# Altium PCB Sensorbox_Hub_ESP32.PCBDOC (part 3 of 3)
Units mil, origin at the board's own origin, x right, y up, seen from the top; angles counter-clockwise.
Board outline 895.86 x 2876.17 mil, 2 copper layers (Top, Bot), stack 61.855 mil thick; 68 components, 62 nets, 284 pads, 203 vias.
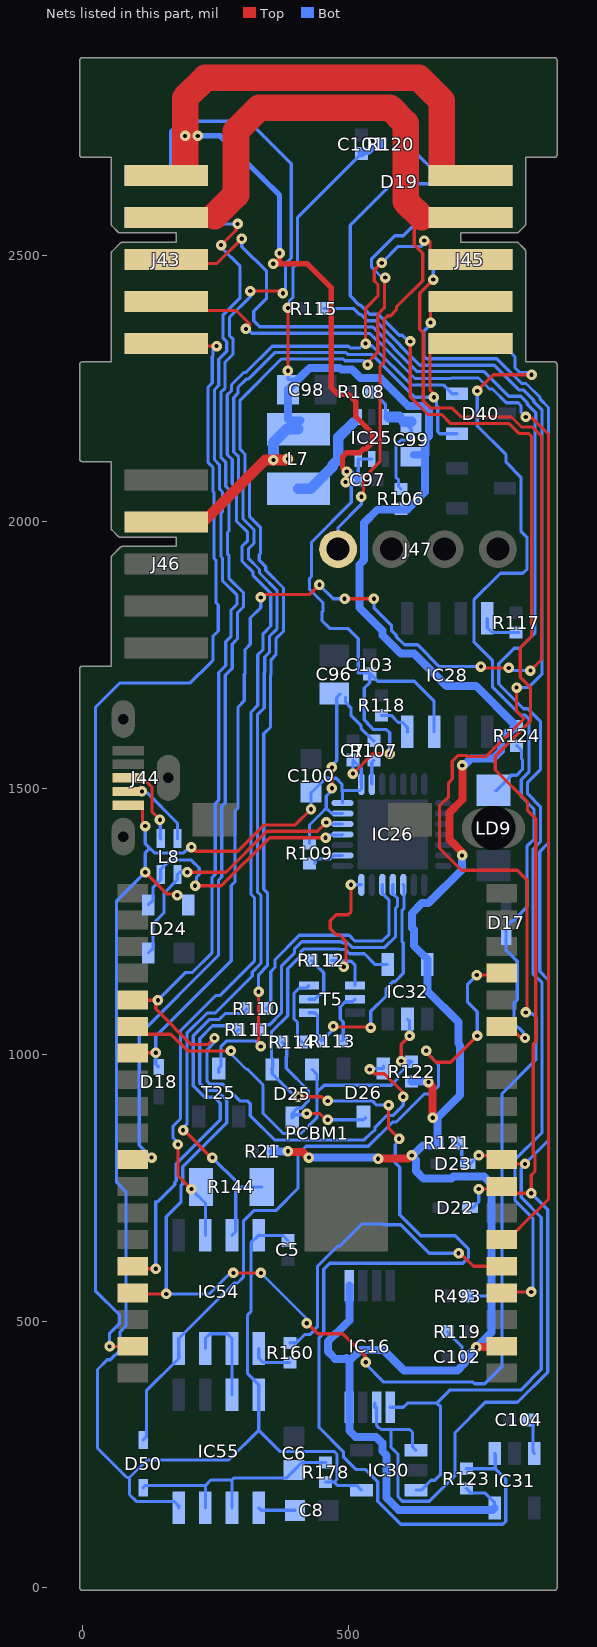
[diagram p2: the nets of this part, all layers, seen from the top]

## Via types
v1: diameter 19.68, hole 7.87, Top to Bot, tented both sides, 192 vias
v2: diameter 47.24, hole 31.5, Top to Bot, tented both sides, 7 vias
v3: diameter 30, hole 20, Top to Bot, tented both sides, 4 vias

## Nets (pads, with @x,y where several pads share a name; then routed paths per layer and width w, separated by ;. In a path a pad name is that pad's centre, name@x,y a point inside that pad or via, vN(x,y) a via of type N, cw(c..) or ccw(c..) an arc to the next point about the centre after c; other vN are vias at no path point) (continued)
GPIO0/EMAC_CLKIN: D25.2 IC32.2 PCBM1.25 R122.2 | length 881.8
  Top w6: PCBM1.25@94.49,1053.15 109.2,1038.43 166.29,1038.43 197.53,1007.2 v1(278.99,1007.2) ; v1(598.43,988.19) 598.43,1019.69 v1(614.17,1035.43)
  Bot w6: v1(278.99,1007.2) 278.99,1001.45 307.16,973.28 309.26,973.28 339.1,943.44 339.1,890.3 377.18,852.22 410.36,852.22 440.1,881.96 440.1,929.13 ; D25.2@431.1,972.44 440.1,963.44 440.1,929.13 ; v1(598.43,988.19) 616.07,988.19 R122.2@617.25,987.01 ; IC32.2@610.24,1066.93 614.17,1063 v1(614.17,1035.43) ; R122.2@618.11,987.01 617.32,987.01 593.29,962.97 593.29,956.54 579.58,942.84 453.81,942.84 440.1,929.13
GSM_PWR: D26.2 J43.7 PCBM1.24 | length 2613.9
  Top w6: PCBM1.24@94.49,1103.15 95.27,1102.36 v1(141.73,1102.36) 137.8,1098.43 137.8,1086.05 204.65,1019.2 235.73,1019.2 v1(248.03,1031.49) ; v1(260.3,2519.34) 288.72,2547.76 288.72,2556.43 v1(291.34,2559.05) ; 547.24,964.57 566.93,964.57 602.36,929.14 v1(602.36,921.26)
  Bot w6: v1(141.73,1102.36) 194,1154.63 206.72,1154.63 243.53,1191.43 243.53,1332.64 249.61,1338.72 249.61,1471.42 256.08,1477.89 256.08,1717.28 269.22,1730.43 269.22,1775.34 279.22,1785.34 279.22,1834.61 290.5,1845.88 290.5,1862.13 263.13,1889.5 263.13,1932.25 260.3,1935.08 260.3,2015.89 263.13,2018.72 263.13,2056.08 257.22,2061.98 257.22,2107.12 248.12,2116.23 248.12,2248.16 255.99,2256.03 255.99,2305.03 270.91,2319.95 270.91,2337.79 264.24,2344.45 264.24,2388.71 296.12,2420.58 296.12,2440.87 296.12,2479.4 260.3,2515.23 v1(260.3,2519.34) ; J43.7@157.48,2570.87 169.3,2559.05 v1(291.34,2559.05) ; v1(248.03,1031.49) 248.03,1023.62 234.11,1009.7 234.11,950.01 239.38,944.74 263.92,944.74 295.13,913.53 309.83,913.53 315.1,908.26 315.1,885.68 360.57,840.22 529.2,840.22 543.17,854.19 544.08,854.19 549.35,859.46 549.35,864.31 570.87,885.83 582.68,885.83 602.36,905.51 v1(602.36,921.26) ; v1(539.37,972.44) 541.34,974.41 D26.2@564.96,974.41 D26.2@564.96,978.35
IO0: D18.1 J45.8 PCBM1.26 | length 2638.2
  Top w6: PCBM1.26@94.49,1003.15 95.28,1003.94 v1(137.8,1003.94) ; 342.76,1863.85 426.84,1863.85 v1(444.88,1881.89) ; v1(492.13,1855.87) v1(547.24,1855.87) ; v1(658.53,2454.72) 658.53,2453.58 652.82,2447.86 651.67,2447.86 633.22,2429.41 633.22,2361.42 639.85,2354.79 639.85,2227.19 653.61,2213.44 694.36,2213.44 710.95,2196.85 805.37,2196.85 824.21,2178.01 844.39,2178.01 861.6,2160.8 861.6,1741.83 v1(840.77,1721) ; v1(748.03,1728.35) 750.42,1725.96 v1(800.37,1725.96)
  Bot w6: D18.1@143.17,976.97 137.8,982.35 v1(137.8,1003.94) 137.8,1034.79 279.53,1176.52 279.53,1317.73 286.57,1324.78 286.57,1457.47 292.08,1462.98 292.08,1652.45 303.99,1664.36 303.99,1714.29 305.22,1715.51 305.22,1760.42 315.22,1770.42 315.22,1819.7 334.64,1839.12 v1(334.64,1858.26) ; v1(444.88,1881.89) 444.88,1881.55 470.57,1855.87 v1(492.13,1855.87) ; v1(547.24,1855.87) 547.24,1839 579.92,1806.32 579.92,1796.71 589.23,1787.4 589.23,1784.66 604.5,1769.38 629.12,1769.38 670.15,1728.35 v1(748.03,1728.35) ; v1(658.53,2454.72) 658.53,2481.37 669.29,2492.12 J45.8@728.35,2492.12 ; v1(800.37,1725.96) 805.33,1721 v1(840.77,1721)
IO1: D17.1 J45.10 PCBM1.14 | length 1747.9
  Top w6: v1(740.92,2245.85) 771.08,2276.01 v1(842.95,2276.01) ; PCBM1.14@786.28,1054.27 PCBM1.14@787.4,1053.15 802.12,1038.43 816.15,1038.43 824.18,1030.39 829.61,1030.39 v1(830.71,1031.49)
  Bot w6: J45.10@728.35,2334.64 787.4,2334.64 811.87,2310.18 811.87,2289.1 820.6,2280.37 841.68,2280.37 841.68,2277.28 v1(842.95,2276.01) ; v1(740.92,2245.85) 740.92,2180.01 795.25,2125.69 795.25,2111.53 822.98,2083.8 822.98,1982.07 834.65,1970.4 834.65,1911.52 826.77,1903.65 784.8,1903.65 734.75,1853.6 734.75,1774.83 769.52,1740.06 769.52,1690.79 822.97,1637.35 830.89,1637.35 837.93,1630.31 837.93,1530.53 823.49,1516.09 823.49,1484.91 847.58,1460.81 847.58,1404.35 834.27,1391.03 834.27,1277.15 808.82,1251.7 805.82,1251.7 795.28,1241.15 D17.1@795.25,1220.34 795.28,1196.22 816,1175.5 816,1103.1 809.93,1097.04 809.93,1059.15 828.09,1040.99 828.09,1034.11 v1(830.71,1031.49)
MODBUS_A: D40.2 IC54.6 J45.3 R144.2 | length 2637.5
  Top w6: v1(179.28,831.63) 179.28,773.47 v1(204.72,748.03) ; v1(531.49,2334.64) 531.49,2400.57 554.93,2424.01 554.93,2445.42 547.77,2452.57 547.77,2471.86 v1(561.76,2485.85) ; v1(641.73,2528.01) 650.31,2528.01 652.61,2525.71 652.61,2508.81 669.29,2492.12 J45.3@728.35,2492.12
  Bot w6: v1(179.28,831.63) 179.28,835.34 170.13,844.49 170.13,866.07 184.28,880.22 184.28,1045.31 249.96,1110.98 257.61,1110.98 323.29,1176.66 323.29,1294.14 316.45,1300.98 316.45,1642.88 329.22,1655.65 329.22,1750.48 339.22,1760.48 339.22,1790.4 353.49,1804.67 353.49,1820.28 353.49,1866.07 320.4,1899.16 320.4,1905.61 299.58,1926.42 299.58,1954.03 310.18,1964.63 310.18,1980.24 289.35,2001.07 289.35,2063.79 281.22,2071.92 281.22,2117.06 272.12,2126.17 272.12,2238.21 279.99,2246.09 279.99,2257.13 303.22,2280.37 307.02,2280.37 356.24,2329.59 499.73,2329.59 503.01,2326.31 521.06,2326.31 527.28,2332.54 531.49,2332.54 531.49,2331.01 531.81,2330.7 543.62,2330.7 617.19,2257.13 677.05,2257.13 693.9,2240.29 D40.2@702.76,2240.29 ; v1(204.72,748.03) 230.91,721.85 IC54.6@230.91,661.42 ; v1(561.76,2485.85) 592.79,2516.87 636.18,2516.87 646.96,2527.65 646.6,2528.01 v1(641.73,2528.01)
MODBUS_B: D40.1 IC54.7 J45.5 R144.1 | length 2527.1
  Top w6: v1(188.98,858.27) 190.94,858.27 242.13,807.09 v1(244.09,807.09) ; v1@661.42,2232.28 661.42,2238.28 652.61,2247.09 652.61,2317.96 673.23,2338.58 J45.5@728.35,2338.58
  Bot w6: v1(188.98,858.27) 188.98,861.97 196.28,869.28 196.28,1040.33 234.41,1078.46 249.36,1078.46 318.71,1147.82 318.71,1155.11 335.29,1171.69 335.29,1299.11 328.45,1305.95 328.45,1637.91 341.22,1650.68 341.22,1717.72 342.22,1718.72 342.22,1746.51 351.22,1755.51 351.22,1785.43 365.49,1799.7 365.49,1825.25 365.49,1871.04 332.4,1904.13 332.4,1910.58 311.58,1931.39 311.58,1949.06 322.18,1959.66 322.18,1985.21 301.46,2005.94 301.46,2068.66 293.22,2076.89 293.22,2122.04 284.12,2131.14 284.12,2233.24 291.99,2241.12 291.99,2252.16 308.19,2268.37 311.99,2268.37 361.21,2317.59 494.76,2317.59 498.04,2314.31 543.04,2314.31 623.47,2233.88 v1(659.81,2233.88) ; v1(244.09,807.09) 291.34,759.84 291.34,751.97 ; IC54.7@280.91,661.42 287.82,668.34 287.82,748.45 291.34,751.97 ; R144.1@336.61,751.97 291.34,751.97 ; v1@664.87,2236.62 664.87,2218.25 666.81,2216.31 666.81,2169.51 670.83,2165.49 D40.1@702.76,2165.49
MODBUS_DE: IC54.2 IC54.3 IC55.3 | length 181.3
  Bot w6: IC54.3@230.91,448.82 230.91,467.52 239.72,476.33 272.09,476.33 280.91,467.52 IC54.2@280.91,448.82 IC55.3@280.91,362.2
MODBUS_DI: D50.1 IC54.4 PCBM1.16 | length 1380.9
  Top w6: v1(645.22,1007.43) 645.22,1004.6 663.74,986.09 691.66,986.09 v1(741.01,1035.43) ; v1(740.16,1149.61) 783.86,1149.61 PCBM1.16@787.4,1153.15
  Bot w6: D50.1@114.17,277.17 120.23,283.22 120.23,369.44 180.91,430.12 IC54.4@180.91,448.82 180.91,467.52 285.09,571.71 291.27,571.71 302.31,582.75 302.31,687.87 321.97,707.54 362.98,707.54 404.67,749.22 404.67,813.21 419.68,828.22 536.57,828.22 582.18,873.83 588.83,873.83 641.33,926.33 653.76,926.33 668.45,941.01 668.45,981.38 645.22,1004.6 v1(645.22,1007.43) ; v1(740.16,1149.61) 723.03,1132.47 723.03,1098.49 741.01,1080.51 v1(741.01,1035.43)
MODBUS_RO: PCBM1.5 R160.1 | length 589.1
  Top w6: v1(705.99,627.6) 712.25,621.34 715.96,621.34 734.15,603.15 PCBM1.5@787.4,603.15
  Bot w6: R160.1@389.76,459.45 401.62,459.45 416.99,474.82 426.67,474.82 441.13,489.29 441.13,602.74 479.62,641.22 482.96,641.22 523.96,682.23 564.69,682.23 565.82,681.1 597.4,681.1 650.9,627.6 v1(705.99,627.6)
NetC6_2: C6.2 D50.2 IC55.6 IC55.7 R178.2 | length 456.7
  Bot w6: D50.2@114.17,187.4 118.31,191.54 230.91,191.54 ; IC55.7@230.91,149.61 230.91,191.54 ; IC55.6@280.91,149.61 280.91,202.17 ; R178.2@456.69,235.04 412.2,235.04 C6.2@397.64,220.47 382.85,205.68 284.42,205.68 280.91,202.17 ; 230.91,191.54 241.54,202.17 280.91,202.17
NetC8_2: C8.2 IC55.5 | length 70.1
  Bot w6: IC55.5@330.91,149.61 335.24,145.28 C8.2@399.21,145.28
NetC96_2: C96.2 IC26.6 R107.2 R109.2 | length 443.6
  Top w6: v1(468.5,1500) v1(468.5,1539.37)
  Bot w6: R109.2@426.26,1396.46 426.26,1431.11 447.98,1452.82 457.82,1462.67 ; v1(468.5,1500) 468.5,1496.29 457.82,1485.61 457.82,1462.67 ; v1(468.5,1539.37) 468.5,1543.07 477.5,1552.07 477.5,1670.42 C96.2@484.25,1677.17 ; IC26.6@488.19,1452.76 467.73,1452.76 457.82,1462.67 ; C96.2@494.09,1671.26 494.09,1661.42 503.94,1651.57 503.94,1636.88 522.78,1618.04 522.78,1613.05 546.46,1589.37 R107.2@547.24,1589.37
NetC99_1: C99.1 IC25.6 R106.1 R108.2 | length 261.3
  Bot w6: R108.2@542.13,2248.03 542.13,2247.24 568.76,2220.61 568.76,2196.99 IC25.6@574.8,2196.85 ; R106.1@597.95,2061.81 593.36,2066.4 593.36,2079.13 588.44,2084.05 588.44,2144.62 593.71,2149.89 594.84,2149.89 598.63,2153.68 617.13,2153.68 617.13,2174.21 C99.1@603.21,2188.13
  Bot w20: IC25.6@574.8,2196.85 594.49,2196.85 ; C99.1@603.21,2188.13 C99.1@617.27,2188.13
NetC104_2: C104.2 IC31.3 | length 67.9
  Bot w6: C104.2@836.61,314.96 845.82,305.76 845.82,254.57 IC31.3@848.43,251.97
NetD19_1: D19.1 J45.7 T25.3 | length 2192.7
  Top w6: v1(330.71,1118.11) 330.71,1019.68 v1(334.64,1015.75) ; v1(535.43,2295.27) 531.49,2295.27 554.27,2318.05 554.27,2389.18 566.93,2401.83 566.93,2456.69 v1(568.62,2458.38)
  Bot w6: T25.3@255.91,966.54 T25.3@255.91,974.41 260.14,978.65 260.14,1015 271.18,1026.04 277.37,1026.04 324.35,1026.04 v1(334.64,1015.75) ; v1(330.71,1118.11) 330.71,1150.14 347.29,1166.72 347.29,1304.08 340.45,1310.92 340.45,1602.4 353.22,1615.17 353.22,1712.75 354.22,1713.75 354.22,1741.54 363.22,1750.54 363.22,1780.46 377.49,1794.73 377.49,1830.22 377.49,1876.01 344.4,1909.1 344.4,1915.55 332.16,1927.79 332.16,1938.46 334.18,1940.48 334.18,1990.18 313.46,2010.91 313.46,2073.63 305.22,2081.87 305.22,2127.01 296.12,2136.11 296.12,2228.27 373.44,2305.59 489.79,2305.59 493.07,2302.31 528.4,2302.31 v1(535.43,2295.27) ; v1@565.62,2455.38 553.98,2467.01 542.92,2478.05 542.92,2493.66 586.06,2536.8 602.41,2536.8 636.47,2570.86 ; D19.1@594.49,2610.88 594.49,2605.96 615.46,2584.99 622.35,2584.99 636.47,2570.86 ; J45.7@728.35,2570.86 636.47,2570.86
NetD24_2: D24.2 IC26.5 L8.4 | length 530.2
  Top w6: v1(196.85,1342.52) 269.58,1342.52 346.45,1419.39 441.05,1419.39 457.61,1435.95 v1(457.75,1435.95)
  Bot w6: D24.2@124.02,1190.94 132.83,1199.76 132.83,1246.08 153.25,1266.5 153.25,1303.44 178.01,1328.2 178.01,1338.05 L8.4@178.54,1338.58 182.48,1342.52 v1@196.31,1342.52 ; v1@452.76,1437.01 v1@453.81,1435.95 ; v1(457.75,1435.95) v1@453.81,1435.95 ; IC26.5@488.19,1433.07 456.69,1433.07 v1@453.81,1435.95
NetD24_3: D24.3 IC26.4 L8.1 | length 515.3
  Top w6: v1(211.62,1317.02) 261.05,1317.02 351.42,1407.39 v1(456.35,1407.39)
  Bot w6: D24.3@124.02,1281.5 132.83,1290.31 132.83,1314.52 147.05,1328.74 L8.1@147.05,1338.58 147.05,1348.42 163.92,1365.3 204.66,1365.3 219.53,1350.43 219.53,1338.55 214.23,1333.25 214.23,1319.64 v1(211.62,1317.02) ; v1(456.35,1407.39) 459.4,1407.39 464.28,1412.27 487.08,1412.27 IC26.4@488.19,1413.39
NetD25_3: D25.3 D26.3 R114.2 | length 327.2
  Top w6: v1(421.26,889.76) 445.8,889.76 457.61,877.95 v1(460.63,877.95)
  Bot w6: R114.2@375.2,1023.62 383.61,1015.2 383.61,996.88 382.73,995.99 382.73,974.62 424.35,933 424.35,913.45 410.46,899.56 403.5,899.56 393.7,889.76 D25.3@393.7,881.89 399.37,887.56 419.05,887.56 v1(421.26,889.76) ; v1(460.63,877.95) 527.56,877.95 D26.3@531.5,881.89
NetIC25_4: IC25.4 L7.1 | length 180
  Bot w20: L7.1@405.51,2062.01 428.15,2062.01 470.22,2104.08 470.22,2107.02 480.57,2117.37 480.57,2158.71 508.14,2186.28
NetIC26_2: IC26.2 R109.1 | length 61.4
  Bot w6: R109.1@437.01,1359.45 437.01,1366.54 438.34,1367.87 465.7,1367.87 471.85,1374.02 IC26.2@488.19,1374.02
NetIC26_9: IC26.9 R107.1 | length 46.1
  Bot w6: IC26.9@543.31,1507.87 543.31,1548.43 R107.1@547.24,1552.36
NetIC26_24: IC26.24 R113.1 T5.1 | length 476.3
  Top w6: v1(470.96,1053.64) 472.19,1052.41 540.11,1052.41 v1(541.34,1051.18)
  Bot w6: T5.1@425.2,1078.74 436.02,1078.74 441.58,1073.18 441.58,1034.01 R113.1@450,1025.59 450,1026.38 468.34,1044.72 468.34,1051.02 v1(470.96,1053.64) ; v1(541.34,1051.18) 541.34,1081.63 570.02,1110.31 570.02,1124.23 582.75,1136.96 586.69,1136.96 602.36,1152.63 602.36,1210.06 599.67,1212.75 599.67,1270.18 603.38,1273.89 603.38,1317.88 IC26.24@602.36,1318.9
NetIC26_25: IC26.25 R111.1 | length 486.3
  Bot w6: R111.1@337.4,1055.91 337.94,1056.45 351.46,1056.45 373.5,1078.48 373.5,1166.33 397.9,1190.73 397.9,1198.07 412.05,1212.22 485.59,1212.22 488.13,1209.68 498.12,1209.68 506.36,1201.44 534.56,1201.44 567.89,1201.44 587.67,1221.21 587.67,1275.15 591.38,1278.86 591.38,1293.86 582.68,1302.56 IC26.25@582.68,1318.9
NetIC26_26: IC26.26 R110.1 | length 439.5
  Bot w6: R110.1@345.28,1086.61 353.69,1095.03 353.69,1156.15 361.5,1163.96 361.5,1178.64 407.08,1224.22 500.55,1224.22 511.33,1213.44 547.31,1213.44 562.92,1213.44 575.67,1226.18 575.67,1290.07 562.99,1302.74 IC26.26@562.99,1318.9
NetIC26_28: IC26.28 R112.1 T5.4 | length 320.1
  Top w6: v1(490.68,1165.35) 493.3,1167.97 493.3,1174.46 494.56,1175.71 494.56,1213.25 482.56,1225.25 476.45,1225.25 465.41,1236.29 465.41,1251.9 476.45,1262.93 499.04,1262.93 503.94,1267.83 v1(503.94,1318.89)
  Bot w6: R112.1@467.32,1177.17 485.43,1177.17 486.35,1178.09 487.28,1177.17 ; v1(490.68,1165.35) 490.68,1173.76 487.28,1177.17 ; v1(503.94,1318.89) IC26.28@523.62,1318.9 ; T5.4@511.81,1129.92 511.81,1168.12 504.46,1175.47 489.44,1175.47 487.74,1177.17 487.28,1177.17
NetIC28_4: IC28.4 R118.2 | length 67.1
  Bot w6: R118.2@561.76,1637.15 562.03,1636.88 579.45,1636.88 592.74,1623.6 601.23,1623.6 610.04,1614.78 IC28.4@610.04,1606.3 IC28.4@610.8,1605.54
NetIC28_8: IC28.8 R117.2 | length 80.1
  Bot w6: IC28.8@760.04,1818.9 760.04,1801.33 768.85,1792.52 R117.2@818.9,1792.52
NetIC54_1: IC54.1 R160.2 | length 80.1
  Bot w6: IC54.1@330.91,448.82 330.91,431.25 339.72,422.44 R160.2@389.76,422.44
NetJ44_2: J44.2 L8.3 | length 145.7
  Top w6: J44.2@86.61,1494.09 v1(111.92,1494.09)
  Bot w6: v1(111.92,1494.09) 114.54,1491.48 121.79,1491.48 178.54,1434.72 L8.3@178.54,1405.51
NetJ44_3: J44.3 L8.2 | length 154.6
  Top w6: J44.3@86.61,1519.68 92.47,1513.83 118.84,1513.83 130.76,1501.9 130.76,1455.85 v1(145.67,1440.94)
  Bot w6: v1(145.67,1440.94) 146.36,1440.26 146.36,1406.2 L8.2@147.05,1405.51
NetLD9_2: LD9.2 R124.1 | length 117.2
  Bot w6: LD9.2@775.59,1496.06 777.56,1496.06 804.09,1522.59 804.09,1524.46 814.89,1524.46 825.93,1535.5 825.93,1553.78 824.17,1555.55 824.17,1571.5 815.75,1579.92 R124.1@814.96,1579.92
NetR112_2: R112.2 T5.2 | length 101.7
  Bot w6: T5.2@425.2,1104.33 436.02,1104.33 444.74,1113.05 447.63,1113.05 452.9,1118.32 452.9,1153.8 430.31,1176.38 R112.2@430.31,1177.17
NetR113_2: R113.2 T5.5 | length 101.8
  Bot w6: R113.2@487.01,1025.59 489.81,1028.39 489.81,1061.44 484.11,1067.14 484.11,1090.34 493.22,1099.46 506.94,1099.46 T5.5@511.81,1104.33
NetR114_1: R114.1 T5.3 | length 131.9
  Bot w6: R114.1@412.2,1023.62 403.79,1032.04 403.79,1060.85 397.5,1067.14 397.5,1115.93 406.61,1125.05 420.32,1125.05 T5.3@425.2,1129.92
OSC_DIS: D25.1 IC31.1 IC32.4 R123.2 | length 2293.1
  Top w6: v1(405.51,921.26) 449.05,921.26 456.93,913.38 v1(460.63,913.38) ; v1(574.8,905.51) 574.8,862.2 v1(594.49,842.52)
  Bot w6: v1(405.51,921.26) 402.89,923.88 396.99,923.88 356.3,964.57 D25.1@356.3,972.44 354.86,973.88 357.43,976.45 357.43,992.06 354.78,994.7 354.78,1042.8 385.5,1073.51 385.5,1161.36 409.9,1185.76 409.9,1193.1 415.17,1198.37 482.47,1198.37 483.16,1197.68 493.15,1197.68 501.39,1189.44 529.59,1189.44 549.74,1169.29 IC32.4@572.84,1169.29 ; v1(460.63,913.38) 460.77,913.53 544.08,913.53 552.1,905.51 v1(574.8,905.51) ; v1(594.49,842.52) 594.49,838.81 587.27,831.59 587.27,797.21 595.8,788.67 595.8,699.67 634.88,660.59 699.65,660.59 724.84,635.4 724.84,619.79 713.8,608.76 464.12,608.76 453.13,597.77 453.13,477.98 444.41,469.26 444.41,300.64 489.9,255.15 489.9,245.41 513.3,222.01 530.88,222.01 554.28,198.61 554.28,161.92 597.24,118.95 789.16,118.95 794.43,124.22 794.43,203.6 774.8,223.23 ; R123.2@720.47,223.23 774.8,223.23 ; IC31.1@773.62,251.97 774.8,250.79 774.8,223.23
P3V3: C98.1 C99.2 C101.2 C102.2 IC16.1 IC16.8 IC31.5 IC32.5 J46.2 L7.2 PCBM1.2 R21.2 R106.2 R119.1 R120.2 R121.2 R122.1 R123.1 R124.2 R493.1 | length 5349
  Top w6: v1(385.83,2283.46) v1(385.83,2401.57)
  Top w15: v1(385.83,818.9) 386.72,818 413.01,818 423.93,807.09 v1(425.2,807.09) ; v1(555.11,804.98) 612.07,804.98 v1(618.11,811.02) ; v1(649.6,948.82) 649.6,947.55 657.48,939.68 v1@657.48,884.05 ; v1(712.6,1374.01) 712.6,1378.14 713.68,1379.22 688.98,1403.92 688.98,1454.65 713.09,1478.76 v1(713.09,1542.88) ; v1(739.57,451.18) 740.46,452.08 786.33,452.08 PCBM1.2@787.4,453.15
  Top w20: J46.2@157.48,2000 227.43,2000 343.56,2116.12 v1(358.69,2116.12) 383.84,2116.12 v1(385.83,2118.11)
  Bot w6: v1(385.83,2283.46) 385.83,2267.72 398.62,2267.72 415.5,2284.59 422.39,2284.59 ; v1(385.83,2401.57) 388.51,2404.25 388.51,2414.54 395.3,2421.33 395.3,2476.94 403.95,2485.59 403.95,2571.28 C101.2@523.62,2690.94 ; R120.2@551.82,2717.08 R120.2@560.24,2708.66 ; R119.1@685.24,480.31 685.24,479.53 712.25,452.51 712.25,442.27 C102.2@721.46,433.07 ; R123.1@720.47,186.22 728.89,177.8 755.27,177.8 773.62,159.45 IC31.5@773.62,149.61 ; R493.1@723.43,547.24 767.44,547.24
  Bot w15: R21.2@357.09,818.9 v1(385.83,818.9) ; L7.2@409.45,2189.96 389.15,2189.96 385.83,2193.29 C98.1@385.83,2248.03 422.39,2284.59 426.89,2289.09 482.95,2289.09 486.24,2285.81 506.12,2285.81 522.13,2269.8 559.13,2269.8 611.55,2217.38 642.4,2217.38 650.31,2209.47 650.31,2160.89 643.7,2154.28 643.7,2125.98 642.67,2125.98 ; v1(425.2,807.09) 551.74,807.09 553.84,804.98 v1(555.11,804.98) ; IC16.1@500.98,566.93 500.98,501.46 475.62,476.1 474.58,476.1 460.91,462.42 460.91,443.09 474.58,429.41 493.92,429.41 495.34,430.83 500.98,425.19 ; C101.2@523.62,2690.94 528.33,2695.65 536.39,2695.65 544.7,2703.96 556.32,2703.96 560.24,2707.87 R120.2@560.24,2708.66 ; v1(618.11,811.02) v1@619.02,810.11 ; R122.1@618.11,950 618.7,949.41 649.01,949.41 v1(649.6,948.82) ; C99.2@622.05,2125.98 642.67,2125.98 ; IC32.5@647.64,1169.29 647.64,1179.14 622.12,1204.66 622.12,1234.63 618.39,1238.36 618.39,1265.57 637.55,1284.73 649.77,1284.73 712.78,1347.74 712.78,1377.06 712.6,1376.87 v1(712.6,1374.01) ; IC32.5@647.83,1169.29 647.83,1119.3 705.66,1061.46 705.66,1020.79 708.95,1017.51 708.95,924.24 667.5,882.78 v1@659.64,882.78 ; 666.54,876.77 R121.2@666.54,834.65 666.54,833.86 662.62,829.94 638.85,829.94 v1@619.02,810.11 ; v1@714.66,1541.14 729.39,1555.87 771.02,1555.87 785.35,1570.2 785.35,1593.02 797.16,1604.84 802.08,1604.84 810.26,1613.01 810.26,1620.85 739.08,1692.03 683.14,1692.03 622.3,1752.86 597.69,1752.86 563.42,1787.13 563.42,1795.78 519.69,1839.52 519.69,1919.38 528.85,1928.55 528.85,1998.04 554.43,2023.62 610.24,2023.62 642.67,2056.06 642.67,2125.98 ; IC31.5@773.62,149.61 769.78,145.76 593.77,145.76 570.78,168.75 570.78,248.41 562.99,256.19 562.99,271.06 558.78,275.28 550.87,283.18 512.8,283.18 500.98,295 IC16.8@500.98,338.58 500.98,425.19 ; 500.98,425.19 522.02,446.23 565.02,446.23 603.88,407.37 703.82,407.37 716.75,420.3 716.75,428.37 C102.2@721.46,433.07 767.44,479.05 767.44,547.24 767.44,757.7 753.76,771.37 696.57,771.37 693.19,767.99 639.94,767.99 626.26,781.67 626.26,802.87 v1@619.02,810.11
  Bot w20: v1(358.69,2116.12) 358.69,2148.85 384.06,2174.21 L7.2@405.51,2174.21
  other v1: 657.48,881.89
P5V0: C5.1 C7.1 C97.2 C100.1 C103.2 D24.4 IC25.2 IC25.3 IC26.7 IC26.8 IC28.3 IC30.4 IC54.8 IC55.4 IC55.8 J43.1 J44.1 J45.1 R178.1 | length 5944.1
  Top w6: J44.1@86.61,1468.5 107.28,1468.5 113.14,1462.64 113.14,1437.81 ; v1(118.11,1342.52) 159.17,1301.46 175.76,1301.46 v1(178.01,1299.21) ; v1(204.72,1389.76) 212.6,1381.89 291.98,1381.89 341.47,1431.39 399.89,1431.39 v1(429.13,1460.63) ; v1(507.87,1527.56) 545.28,1564.96 v1(576.77,1564.96)
  Top w10: v1(358.27,2484.25) v1@362.2,2484.25 ; v1(370.08,2503.93) 370.08,2492.12 v1@362.2,2484.25 ; v1(496.06,2094.49) 488.19,2102.36 488.19,2122.05 496.06,2129.92 520.74,2129.92 527.46,2136.64 532.26,2136.64 544.46,2148.85 544.46,2166.11 513.12,2197.45 513.12,2225.23 499.36,2239 479.55,2239 467.35,2251.2 467.35,2439.16 422.26,2484.25 v1@362.2,2484.25
  Top w50: 192.91,2672.38 v1(192.91,2724.41) 192.91,2795.28 230.81,2833.17 631.39,2833.17 674.61,2789.96 J45.1@674.61,2654.92
  Bot w6: v1(118.11,1429.13) 118.11,1396.13 126.78,1387.46 ; IC55.8@180.91,149.61 180.91,153.06 172.09,161.87 101.39,161.87 88.58,174.68 88.58,206.69 ; v1(204.72,1389.76) 201.11,1389.76 190.15,1378.79 135.45,1378.79 126.78,1387.46 ; C5.1@385.83,651.57 376.62,660.78 331.54,660.78 IC54.8@330.91,661.42 316.39,646.91 316.39,518.11 310.09,511.81 310.09,401.72 330.91,380.91 IC55.4@330.91,362.2 330.91,295.47 ; v1(429.13,1460.63) 429.13,1492.12 430.12,1492.13 456.83,1518.84 476.31,1518.84 487.35,1507.8 487.35,1492.97 488.19,1492.13 ; R178.1@456.69,198.03 472.44,198.03 ; IC26.7@488.19,1472.44 488.19,1492.13 ; v1(507.87,1527.56) C7.1@507.87,1553.15 523.48,1537.54 523.48,1508.02 IC26.8@523.62,1507.87 523.62,1498.79 520.94,1496.11 492.17,1496.11 488.19,1492.13 ; IC30.4@523.62,183.07 514.81,191.88 478.59,191.88 472.44,198.03 ; IC25.2@543.31,2118.11 IC25.3@517.72,2118.11 C97.2@517.72,2078.74 504.78,2065.8 504.78,2036.51 429.98,1961.71 429.98,1897.56 426.04,1893.63 426.04,1874.08 451.38,1848.74 451.38,1832.35 449.66,1830.64 449.66,1815.03 464.48,1800.2 498.26,1800.2 517.72,1780.75 517.72,1716.54 539.26,1716.54 C103.2@539.26,1716.01 ; v1(576.77,1564.96) 576.77,1604.23 570.77,1610.23 546.5,1610.23 534.78,1621.95 534.78,1623.01 529.2,1628.59 529.2,1688.3 539.26,1698.36 C103.2@539.26,1716.01 ; IC28.3@660.04,1606.3 660.04,1663.5 622.75,1700.79 554.56,1700.79 539.3,1716.05 C103.2@539.26,1716.01 ; 88.58,206.69 121.52,239.63 275.06,239.63 330.91,295.47 ; 88.58,206.69 83.61,206.69 28.4,261.9 28.4,409.38 46.65,427.63 52.7,427.63 70.95,445.88 70.95,480.09 82.02,491.16 82.02,743.21 64.33,760.9 64.33,1288.74 v1(118.11,1342.52) 118.11,1378.79 126.78,1387.46 ; 330.91,295.47 370.61,255.76 472.32,255.76 477.9,250.18 477.9,203.49 472.44,198.03
  Bot w10: v1(192.91,2724.41) v1(216.54,2724.41) 258.71,2724.41 337.57,2645.55 370.08,2613.04 v1(370.08,2503.93) ; v1(496.06,2094.49) 501.97,2094.49 C97.2@517.72,2078.74
  other v1: 494.09,2074.8
P12V0: J43.2 J45.2 J47.1 | length 1567
  Top w6: J43.2@157.48,2570.87 J43.2@221.01,2570.87 ; v1@527.56,2051.18 527.56,2081.62 558.46,2112.53 558.46,2291.66 566.27,2299.47 566.27,2380.02 572.92,2386.66 578.41,2386.66 589.45,2397.7 589.45,2403.19 638.92,2452.67 638.92,2504.17 622.89,2520.2 622.89,2557.28 636.47,2570.86 J45.2@728.35,2570.86
  Top w50: 248.17,2573.64 288.43,2613.9 288.43,2733.31 332.29,2777.17 577.16,2777.17 606.88,2747.45 606.88,2601.47 636.98,2571.37
  Bot w6: J47.1@479.92,1948.82 479.92,1989.42 523.62,2033.12 v1(523.62,2047.24)
SCL: D22.1 IC16.6 IC30.1 J45.6 PCBM1.8 R120.1 | length 3779
  Top w6: v1(615.46,2338.58) 615.46,2234.62 648.64,2201.44 674.19,2201.44 690.78,2184.85 800.4,2184.85 819.24,2166.01 837.26,2166.01 842.65,2160.61 842.65,1784.65 821.93,1763.93 821.93,1708.65 840.77,1689.81 840.77,1625.81 774.98,1560.02 774.98,1534.47 835.49,1473.96 835.49,1458.14 850.86,1442.77 850.86,1025 846.27,1020.41 846.27,814.24 849.55,810.95 849.55,780.92 842.52,773.89 v1(842.52,740.16) 800.39,740.16 PCBM1.8@787.4,753.15 782.28,748.03 v1(744.09,748.03)
  Bot w6: IC16.6@548.62,338.58 IC16.6@548.62,346.46 ; IC16.6@552.17,338.58 552.17,304.13 556.61,299.68 557.7,299.68 560.5,296.89 579.49,296.89 ; R120.1@597.24,2708.66 597.24,2707.87 605.66,2699.46 619.44,2699.46 669.29,2649.6 J45.6@728.35,2649.6 713.39,2634.65 580.92,2634.65 502.69,2556.42 502.69,2423.99 519.95,2406.74 522.23,2406.74 539.48,2389.48 555.58,2389.48 594.87,2350.2 600.43,2350.2 612.04,2338.58 v1(615.46,2338.58) ; IC30.1@625.98,257.87 619.66,264.2 619.66,291.34 614.11,296.89 579.49,296.89 ; D22.1@727.36,712.6 732.28,712.6 744.09,724.41 v1(744.09,748.03) ; v1(842.52,740.16) 873.36,709.31 873.36,404.55 816.61,347.79 756.02,347.79 699.27,291.04 699.27,210.16 651.37,162.26 600.6,162.26 592.62,170.24 592.62,249.9 579.49,263.03 579.49,296.89
SDA: D23.1 IC16.5 IC30.3 J45.4 PCBM1.9 R121.1 | length 2983.1
  Top w6: v1(653.54,2374.01) 653.54,2396.7 670.23,2413.38 J45.4@728.35,2413.38 ; v1(744.09,811.02) 779.53,811.02 PCBM1.9@787.4,803.15 795.27,795.28 v1(830.71,795.28)
  Bot w6: IC16.5@577.76,338.58 602.36,338.58 610.24,346.46 665.35,346.46 ; IC30.3@625.98,183.07 635.83,183.07 654.39,201.63 661.35,201.63 672.38,212.67 672.38,339.43 665.35,346.46 ; v1(653.54,2374.01) 653.54,2370.99 640.61,2358.06 640.61,2311.23 645.88,2305.96 778.04,2305.96 824.3,2259.7 832.62,2259.7 858.98,2233.34 858.98,2230.48 874.86,2214.6 874.86,2179.1 874.86,1397.68 858.27,1381.09 858.27,1156.37 874.86,1139.78 874.86,839.43 v1(830.71,795.28) 823.68,788.24 823.68,747.96 823.68,732.35 861.36,694.66 861.36,409.52 822.58,370.73 689.63,370.73 665.35,346.46 ; R121.1@703.54,834.65 711.96,826.23 711.96,802.12 718.8,795.27 D23.1@723.43,795.27 728.35,795.27 v1(744.09,811.02)
U0RXD: PCBM1.34 R110.2 | length 684.3
  Top w6: PCBM1.34@94.49,603.15 99.21,598.42 v1(137.8,598.42)
  Bot w6: v1(137.8,598.42) 137.8,724.41 ; 141.73,724.41 142.38,725.06 142.7,725.06 173.42,755.78 173.42,760.34 176.32,763.25 176.32,795.48 259,878.16 259,909.38 247.96,920.42 229.77,920.42 208.28,941.9 208.28,1035.36 239.38,1066.46 256.93,1066.46 267.88,1077.41 299.85,1077.41 308.27,1085.83 R110.2@308.27,1086.61
U0TXD: PCBM1.35 R111.2 R115.2 | length 4070.1
  Top w6: PCBM1.35@94.49,553.15 96.46,551.18 v1(157.48,551.18) ; v1(283.46,590.55) v1(335.24,590.55) ; v1(421.26,496.06) 422.25,496.06 441.94,476.38 488.5,476.38 531.69,433.19 v1(531.69,422.89) ; v1(814.96,1688.98) 814.96,1644.6 828.77,1630.78 758.01,1560.02 722.6,1560.02 720.89,1561.73 705.28,1561.73 694.24,1550.69 694.24,1517.58 687.3,1510.64 687.3,1484.25 670.2,1467.15 670.2,1387.8 711.54,1346.46 816.31,1346.46 834.27,1328.5 834.27,1081.63 v1(832.02,1079.38)
  Bot w6: v1(283.46,590.55) 277.28,590.55 237.91,551.18 v1(157.48,551.18) 157.48,695.95 185.42,723.88 185.42,755.37 188.32,758.28 188.32,789.77 271,872.45 271,914.35 252.61,932.74 234.41,932.74 220.28,946.87 220.28,1030.39 244.35,1054.46 272.62,1054.46 286.18,1040.9 286.57,1040.51 292.52,1046.46 R111.2@292.52,1047.24 ; v1(335.24,590.55) 426.26,499.53 422.79,496.06 v1(421.26,496.06) ; R115.2@452.42,2400.32 509.39,2400.32 520.81,2388.9 523.09,2388.9 534.51,2377.48 550.61,2377.48 596.62,2331.48 596.62,2330.78 633.43,2293.96 773.07,2293.96 819.33,2247.7 827.65,2247.7 846.98,2228.37 846.98,2225.51 862.86,2209.63 862.86,2184.08 862.86,1715.19 836.65,1688.98 v1(814.96,1688.98) ; v1(531.69,422.89) 531.69,419.76 565.62,385.83 733.2,385.83 736.29,382.73 754.87,382.73 787.68,415.54 787.68,717.44 787.68,762.87 787.68,927.34 850.86,990.52 850.86,1070.87 844.76,1076.96 834.94,1076.96 832.53,1079.38 v1(832.02,1079.38)
U1_CTS: J43.6 PCBM1.30 | length 2480.5
  Top w6: PCBM1.30@94.49,803.15 98.42,807.09 v1(129.92,807.09) ; v1(314.96,2433.07) 372.52,2433.07 v1(376.45,2429.13)
  Bot w6: v1(129.92,807.09) 106.95,830.05 106.95,1037.88 255.53,1186.46 255.53,1327.67 261.61,1333.75 261.61,1466.45 268.08,1472.92 268.08,1712.31 281.22,1725.46 281.22,1770.36 291.22,1780.36 291.22,1829.64 302.5,1840.91 302.5,1867.1 275.13,1894.47 275.13,1937.22 272.3,1940.05 272.5,1940.25 272.5,1980.24 275.13,1982.87 275.13,2061.05 269.22,2066.95 269.22,2112.09 260.12,2121.2 260.12,2243.18 267.99,2251.06 267.99,2300.06 282.91,2314.98 282.91,2342.76 276.24,2349.42 276.24,2383.74 314.96,2422.45 v1(314.96,2433.07) ; J43.6@157.48,2649.61 J43.6@165.35,2657.48 ; J43.6@174.17,2666.29 J43.6@165.35,2657.48 ; v1(376.45,2429.13) 381.05,2433.73 381.05,2484.37 391.95,2495.27 391.95,2672.22 312.2,2751.97 185.04,2751.97 165.35,2732.28 J43.6@165.35,2657.48
U1_RTS: J43.4 PCBM1.6 | length 2399
  Top w6: J43.4@157.48,2413.39 174.17,2396.7 288.64,2396.7 314.66,2370.69 307.09,2363.11 v1(307.09,2362.2) ; PCBM1.6@787.4,653.15 798.23,653.15 846.73,701.66 847.64,701.66 874.86,728.88 874.86,2164.51 844.59,2194.78 834.09,2194.78 v1(832.02,2196.85)
  Bot w6: v1(307.09,2362.2) 309.57,2362.2 317.68,2354.09 523.97,2354.09 524.57,2353.48 539.3,2353.48 550.26,2342.52 551.64,2342.52 572.62,2321.54 572.62,2320.84 624.32,2269.13 692.09,2269.13 692.91,2269.96 743.46,2269.96 764.13,2249.29 769.65,2249.29 795.24,2223.7 817.7,2223.7 822.98,2218.43 822.98,2206.45 832.02,2197.41 v1(832.02,2196.85)
U1_RXD: J43.3 PCBM1.4 | length 2796.2
  Top w6: J43.3@157.48,2492.13 164.52,2485.09 252.81,2485.09 v1(299.21,2531.49) ; PCBM1.4@787.4,553.15 789.37,555.12 v1(842.52,555.12)
  Bot w6: v1(299.21,2531.49) 299.21,2516.65 345.8,2470.06 345.8,2419.35 321.71,2395.26 321.71,2377.13 332.75,2366.09 528.94,2366.09 529.54,2365.48 545.64,2365.48 584.62,2326.51 584.62,2325.81 628.46,2281.96 753.95,2281.96 800.21,2235.7 822.67,2235.7 834.98,2223.4 834.98,2220.54 850.86,2204.66 850.86,2189.05 849.74,2187.93 849.74,1791.74 820.75,1762.75 810.51,1762.75 781.52,1733.76 781.52,1695.76 827.83,1649.46 835.75,1649.46 859.58,1625.63 859.58,1535.21 835.49,1511.12 835.49,1489.88 859.58,1465.78 859.58,1399.38 846.27,1386.06 846.27,1151.4 862.86,1134.81 862.86,854.07 811.68,802.89 811.68,752.93 811.68,727.38 845.61,693.44 845.61,561.92 842.52,558.82 v1(842.52,555.12)
U1_TXD: J43.5 PCBM1.37 | length 2260.5
  Top w6: v1(51.18,452.76) PCBM1.37@93.7,452.76 ; PCBM1.37@79.13,452.76 PCBM1.37@87.01,460.63 ; J43.5@157.48,2334.64 J43.5@174.17,2317.96 ; J43.5@162.14,2329.99 v1(252.06,2329.99)
  Bot w6: v1(51.18,452.76) 51.18,477.29 70.02,496.13 70.02,511.74 24.46,557.3 24.46,1651.71 70.65,1697.9 202.75,1697.9 239.95,1735.09 245.22,1740.37 245.22,1785.28 255.22,1795.28 255.22,1844.11 251.13,1848.21 251.13,1927.28 247.19,1931.22 247.19,2055.04 245.22,2057.01 245.22,2102.15 236.12,2111.26 236.12,2253.13 243.99,2261 243.99,2310 245.22,2311.23 245.22,2326.47 248.74,2329.99 v1(252.06,2329.99)
pads on no net: D26.1 IC25.1 IC26.1 IC26.10 IC26.11 IC26.12 IC26.13 IC26.14 IC26.15 IC26.16 IC26.17 IC26.18 IC26.19 IC26.20 IC26.21 IC26.22 IC26.23 IC26.27 IC28.5 IC30.5 IC55.2 J44.4 LD9.3 PCBM1.17 PCBM1.18 PCBM1.19 PCBM1.20 PCBM1.21 PCBM1.22 PCBM1.27 PCBM1.28 PCBM1.32
copper on no net: | length 16.2
  Bot w6: 622.05,1302.74 622.05,1318.9

## Polygon pours and split planes (outlines as drawn)
GND on Top "Signal Layer 1-No Net 1" (solid, remove dead copper, pour order 0): -3.94,2870.08 0,2874.02 889.76,2874.02 889.76,0 885.83,3.94 0,3.94

## Keep-outs
Top:
  lines w3.94: 0,35.43 875.52,39.37 ; 59.06,2118.11 145.67,2118.11 ; 59.05,2295.28 232.28,2295.28 ; 59.06,2688.98 153.54,2688.98 ; 62.99,1724.41 178.11,1724.41 ; 130.98,2049.06 174.29,2049.06 ; 189.71,2114.17 222.93,2114.17 ; 219.55,1795.28 219.55,1811.02 ; 223.98,1724.41 178.11,1724.41 ; 228.65,2444.37 228.65,2460.63 ; 674.55,2295.28 810.55,2295.27 ; 178.11,1724.41 178.11,1724.41 ; 232.28,2295.28 232.28,2295.28
Bot:
  lines w3.94: 0,104.33 875.52,102.36 ; 0,2767.72 885.83,2763.78 ; 59.06,2118.11 185.04,2118.11 ; 59.06,2295.28 228.35,2295.28 ; 62.99,2688.98 149.61,2688.98
KeepOutLayer:
  lines w3.94: 59.06,2118.11 0,2118.11 0,2295.28 ; 59.06,2688.98 -3.94,2688.98 ; 826.77,2295.27 885.82,2295.27 ; -3.94,2688.98 -3.94,2688.98 ; -3.94,2688.98 -3.94,2866.14 885.83,2866.14 885.83,2688.98 826.77,2688.98 ; 0,2295.28 0,2295.28 ; 0,2295.28 59.05,2295.28 ; 59.05,1724.41 0,1724.41 0,0 885.83,0 885.83,2295.28 ; 59.05,1724.41 59.06,1724.41 ; 59.05,2295.28 59.06,2295.27 ; 826.77,2688.97 826.77,2688.98 ; 885.82,2295.27 885.83,2295.28

## Other copper
Top:
  rectangle net P5V0: 484.25,2075.8 503.81,2129.92
  rectangle net GND: 157.48,2078.74 179.28,2121.09
  rectangle net GND: 381.89,618.11 598.43,787.4
  rectangle net GND: 443.89,763.78 531.5,814.83
Bot:
  rectangle net GND: 413.68,2429.13 491.95,2539.37
  rectangle net P3V3: 374.02,2193.29 397.64,2289.09
  rectangle net GND: 472.44,2210.66 500,2270.81
  rectangle net GND: 556.32,2148.85 578.74,2165.35
  rectangle net P5V0: 488.19,2069.54 508.51,2102.36
  rectangle net P5V0: 185.85,2713.58 228.65,2735.23
  rectangle net P5V0: 350.39,2488.19 367.14,2511.81
  rectangle net P3V3: 351.3,2105.19 396.31,2126.06

## Silkscreen, mask and mechanical layers (free items; w line width, h text height)
TopOverlay:
  text "v1.0" at 342.52,2456.69 h60
  text "CAN" at 559.06,2192.91 h59.06
  text "H" at 562.99,2086.61 h59.06
  text "L" at 665.35,2086.61 h59.06
  text "G" at 767.72,2086.61 h59.06
  text "V" at 464.57,2082.68 h59.06
  text "WiFi  / Controller / ESP32" at 342.52,1543.31 h59.06
  text "RESET" at 279.53,1515.75 h39.37
  text "USB" at 255.91,1484.25 h59.06 r90
  text "PWR" at 700.79,1350.39 h39.37 r90
Mechanical1:
  lines w10: 874.02,2688.97 826.77,2688.97 ; 0,2295.27 0,2118.11 59.06,2118.11 59.06,1988.19 74.8,1972.44 181.1,1972.44 181.1,1960.63 181.1,1948.82 74.8,1948.82 59.06,1933.07 59.06,1724.41 0,1724.41 0,0 875.52,0 875.52,2295.27 826.77,2295.27 826.77,2507.87 822.84,2511.81 814.96,2519.68 704.72,2519.68 704.72,2543.31 811.03,2543.31 826.77,2559.05 826.77,2688.97 ; 0,2295.27 59.06,2295.27 ; 0,2295.27 59.06,2295.27 ; 59.06,2295.27 59.06,2503.94 74.8,2519.68 181.1,2519.68 181.1,2543.31 74.8,2543.31 59.06,2559.05 59.06,2688.98 0,2688.98 0,2866.14 885.83,2866.14 885.83,2688.97 ; 826.77,2688.97 885.83,2688.97 ; 826.77,2688.97 885.83,2688.97 ; 826.77,2688.97 885.83,2688.97

## Text inside footprints (layer, text, board x,y; h text height)
J43: BottomOverlay "6" at 285.43,2665.35 h47.24 r180; BottomOverlay "10" at 273.62,2351.18 h47.24 r180; TopOverlay "1" at 280.51,2618.11 h47.24; TopOverlay "5" at 268.7,2303.94 h47.24
J45: BottomOverlay "10" at 555.12,2358.27 h47.24 r180; BottomOverlay "6" at 596.46,2672.44 h47.24 r180; TopOverlay "5" at 589.57,2311.02 h47.24; TopOverlay "1" at 601.38,2625.19 h47.24
J46: BottomOverlay "6" at 285.43,2094.49 h47.24 r180; BottomOverlay "10" at 273.62,1780.32 h47.24 r180; TopOverlay "1" at 280.51,2047.24 h47.24; TopOverlay "5" at 268.7,1733.07 h47.24
J47: TopOverlay "4" at 764.92,2018.82 h39.37; TopOverlay "1" at 474.92,2018.82 h39.37; TopOverlay "2" at 564.92,2018.82 h39.37; TopOverlay "3" at 664.92,2018.82 h39.37